# Altium PCB thru-cal-board-1point2in.PcbDoc
Units mm, origin at the board's own origin, x right, y up, seen from the top; angles counter-clockwise.
Board outline 37 x 16 mm, 4 copper layers (Top Layer, Mid-Layer 1, Mid-Layer 2, Bottom Layer), stack 1.105 mm thick; 2 components, 2 nets, 10 pads, 164 vias.
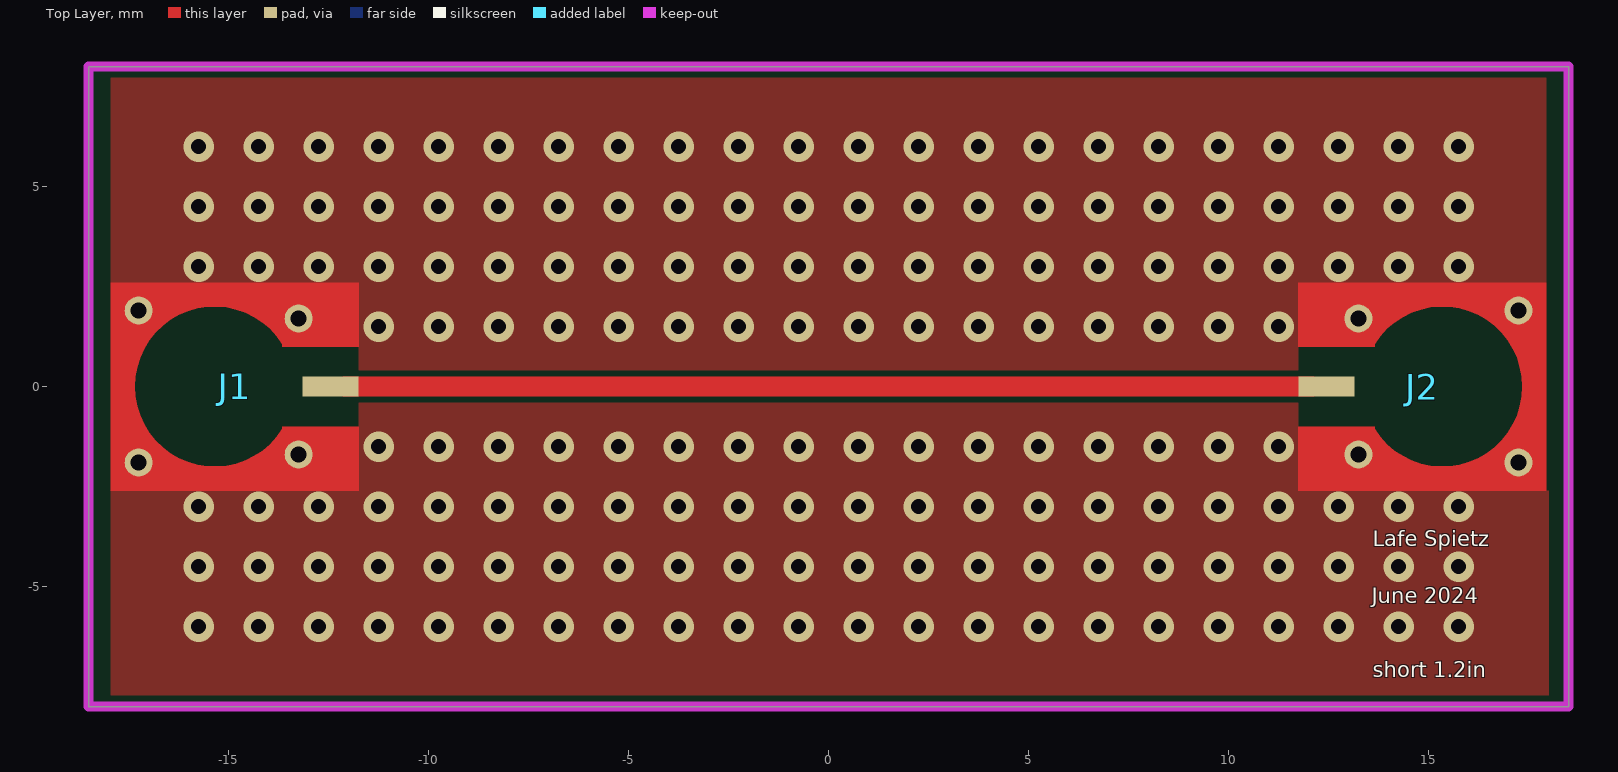
[diagram p0: Top Layer view]
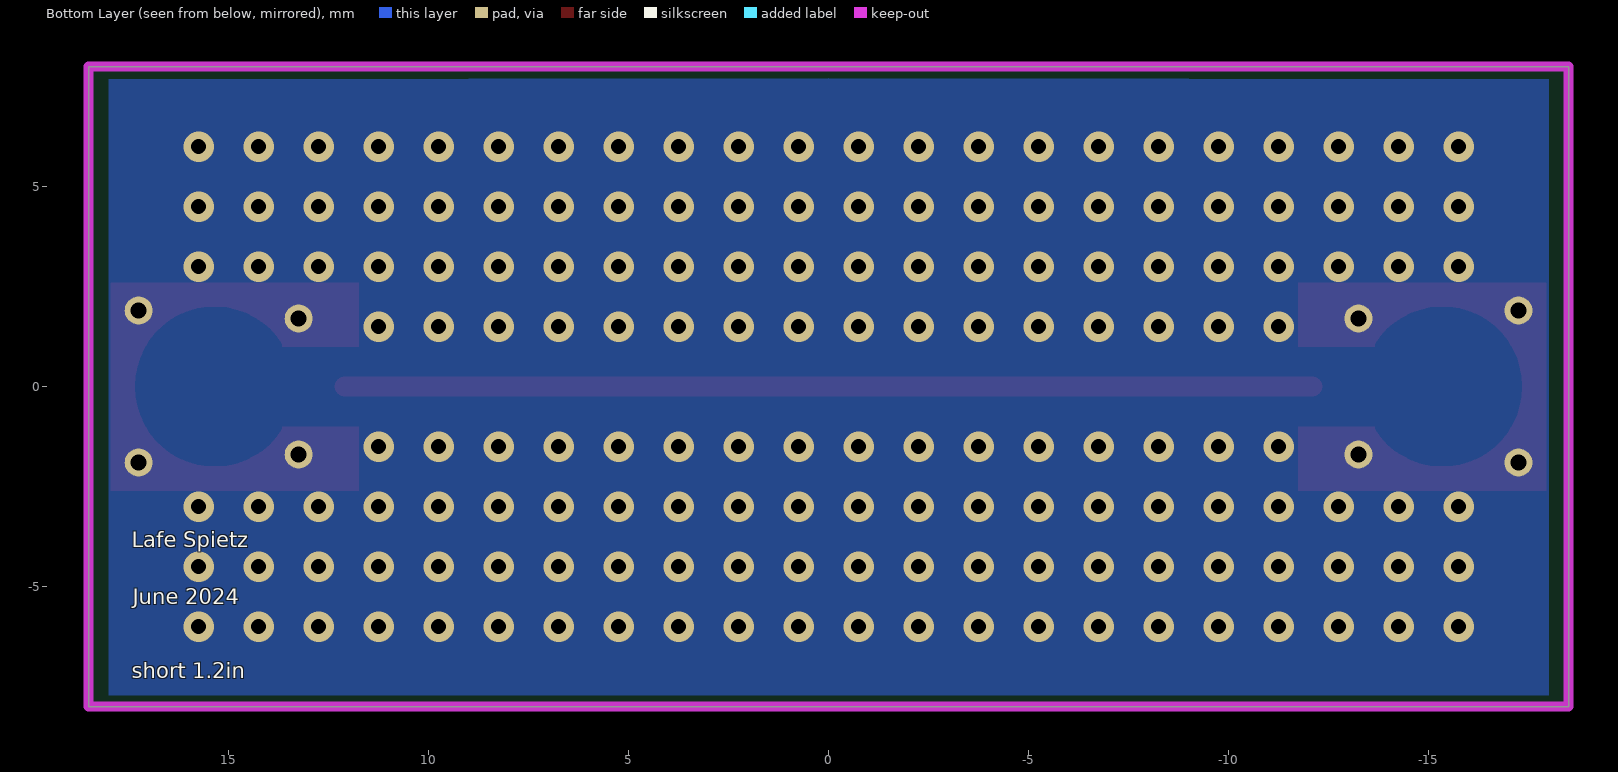
[diagram p1: Bottom Layer view, seen from below]
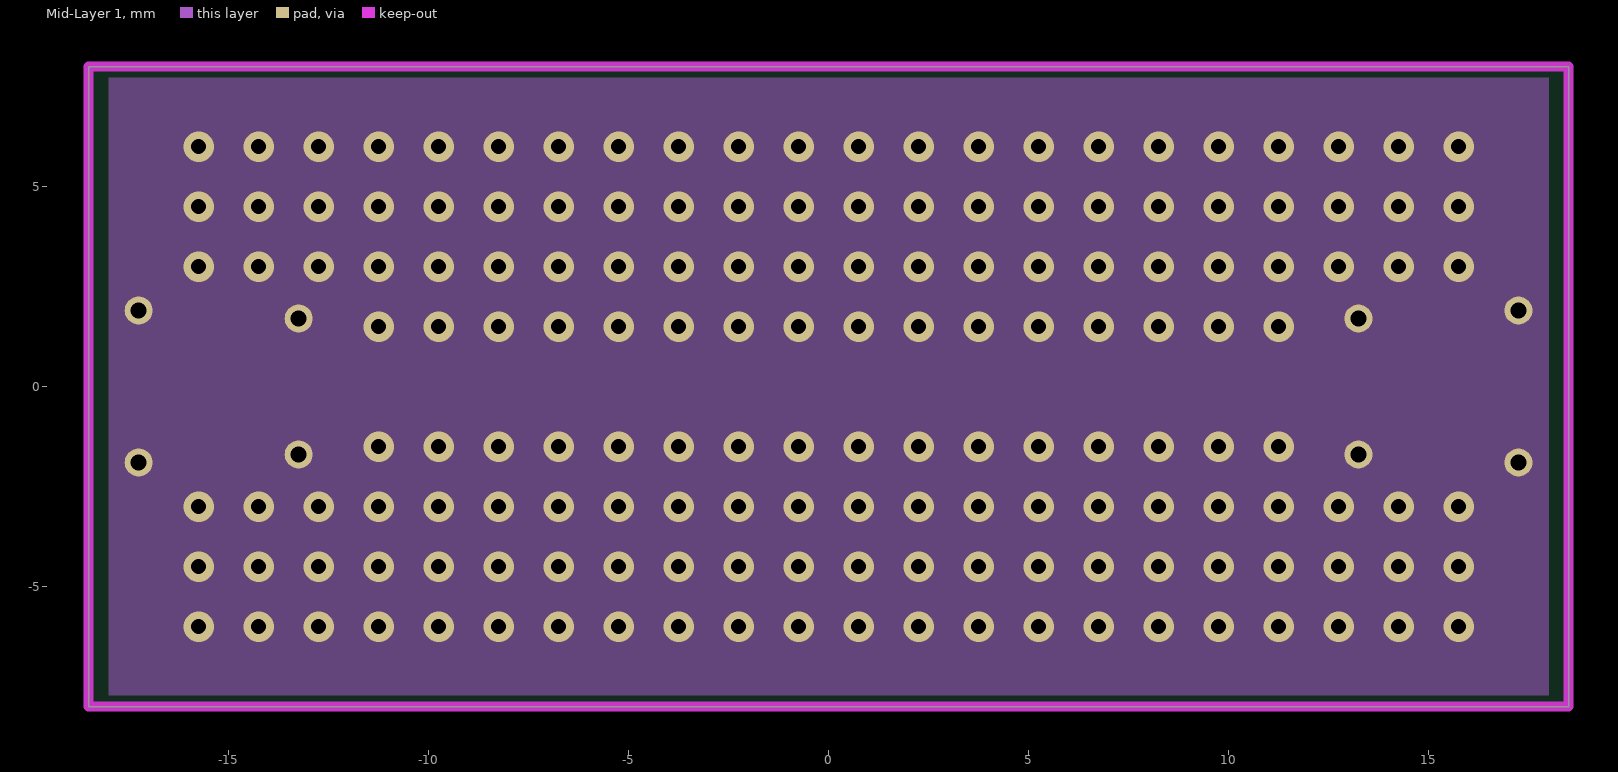
[diagram p2: Mid-Layer 1]
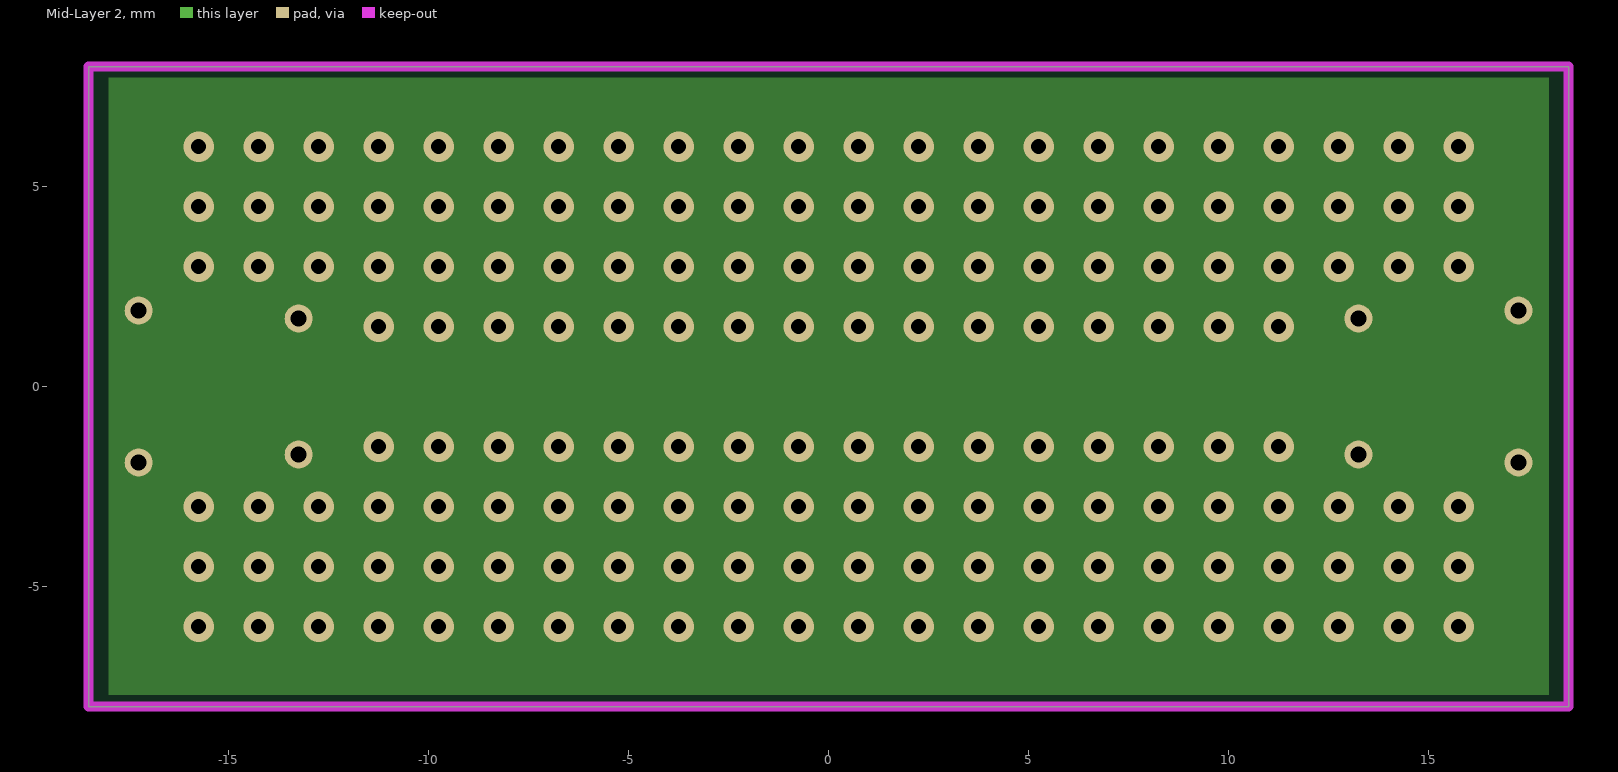
[diagram p3: Mid-Layer 2]

## Layer stack, top to bottom
Top Solder: solder mask 0.0254, SM-001, Dk 4
Top Layer: signal copper 0.035
Core1: dielectric 0.254, RO4350B, Dk 3.48
Mid-Layer 1: signal copper 0.035
Dielectric 1: prepreg 0.1778, PR7628, Dk 4.24
Dielectric 2: prepreg 0.1016, PR2116, Dk 4.17
Dielectric 3: prepreg 0.1778, PR7628, Dk 4.24
Mid-Layer 2: signal copper 0.035
Core2: dielectric 0.254, RO-4350B, Dk 3.48
Bottom Layer: signal copper 0.035
Bottom Solder: solder mask 0.0254, SM-001, Dk 4

## Board outline
-18.5,-8 18.5,-8 18.5,8 -18.5,8

## Design rules (kind name [scope] priority, off if disabled: settings)
Clearance [All] p1: gap=0.254 ignorepadtopadclearanceinfootprint=FALSE except(0: Poly-Poly Poly-Region Poly-Hole; 0.095: Track-Region SMDPad-Region Region-Region; 0.1: Track-Track Track-SMDPad SMDPad-Poly Via-Poly; 0.102: Track-Fill; 0.152: Arc-Poly Track-Poly; 0.203: Arc-SMDPad; 0.229: SMDPad-SMDPad)
PolygonConnect [All] p1: connectstyle=Direct reliefconductorwidth=0.254 reliefentries=4 polygonreliefangle="90 Angle" airgapwidth=0.254
RoutingVias [All] p1: holewidth=0.381 width=0.635 viastyle="Through Hole" minholewidth=0.127 minwidth=0.254 maxholewidth=0.711 maxwidth=1.27
SolderMaskExpansion [All] p1: expansion=0.102 istentingtop=FALSE
Width [All] p1 off: maxlimit=0.55 minlimit=0.1 preferedwidth=0.254 toplayer_prefwidth=0.1 midlayer1_minwidth=0.254 midlayer1_maxwidth=0.254 midlayer2_minwidth=0.254 midlayer2_maxwidth=0.254 bottomlayer_minwidth=0.254 bottomlayer_maxwidth=0.254 minimp=50.000000 maximp=50.000000 favimp=50.000000
Width cpw-Z-1 [All] p2 off: maxlimit=0.5 minlimit=0.174 preferedwidth=0.254 toplayer_minwidth=0.323 toplayer_prefwidth=0.406 impedanceprofiledriven=TRUE impedanceprofileid={FF6547F1-1ACB-4B88-A69B-03F59FE56022} minimp=50.000000 maximp=50.000000 favimp=50.000000
30 further rules are at their usual default settings.

## Components (designator, comment, footprint, x,y, rotation, side; value= is the part's Value field where it differs from the comment)
J1 "SMP-straight-19S141-40ML5" rosenberger-19S141-40ML5 -15.347,0 r90 top
J2 "SMP-straight-19S141-40ML5" rosenberger-19S141-40ML5 15.347,0 r270 top

## Footprints (in the part's own frame and the unit in brackets; to place one, negate y for a bottom-side part, rotate by r counter-clockwise, add the part's x,y. Pads: shape width x height; smd on the part's side, far side on the other; paste and mask are expansions set on the pad)
rosenberger-19S141-40ML5 [mm]
  rect 0.5x1.4 smd: 1(0,-2.9)
  round 0.7 hole 0.4 mask+0: gnd(-1.9,1.9) gnd(-1.7,-2.1) gnd(1.7,-2.1) gnd(1.9,1.9)
  Top Layer region: -2.6,-3.6 -2.6,2.6 2.6,2.6 2.6,-3.6 1,-3.6 1,-1.696 1.06,-1.696 1.759,-0.951 2,0.042 1.718,1.024 0.988,1.739 0,2 -0.988,1.739 -1.718,1.024 -2,0.042 -1.759,-0.951 -1.06,-1.696 -1.06,-1.696 -1,-1.696 -1,-3.6
  body extent -2.5,-3.6 2.5,2.4, height 4.1

## Part data
J1 J2: "SMP Connector Plug, Male Pin 50Ohm Surface Mount Solder", Package=None, Supplier Part Number 1=476-19S201-40ML5, Availability="In Stock", Check_prices=https://www.snapeda.com/parts/853050232/Molex/view-part/?ref=eda, MF=Molex, MP=853050232, Price=None, Purchase-URL=https://pricing.snapeda.com/search/part/853050232/?ref=eda, SnapEDA_Link=https://www.snapeda.com/parts/853050232/Molex/view-part/?ref=snap, Supplier 1=Mouser

## Via types
v1: diameter 0.762, hole 0.381, Top Layer to Bottom Layer, 164 vias

## Nets (pads, with @x,y where several pads share a name; then routed paths per layer and width w, separated by ;. In a path a pad name is that pad's centre, name@x,y a point inside that pad or via, vN(x,y) a via of type N, cw(c..) or ccw(c..) an arc to the next point about the centre after c; other vN are vias at no path point)
GND: J1.gnd J2.gnd
  other v1: -15.75,-6 -14.25,-6 -12.75,-6 -11.25,-6 -9.75,-6 -8.25,-6 -6.75,-6 -5.25,-6 -3.75,-6 -2.25,-6 -0.75,-6 0.75,-6 2.25,-6 3.75,-6 5.25,-6 6.75,-6 8.25,-6 9.75,-6 11.25,-6 12.75,-6 14.25,-6 15.75,-6 -15.75,-4.5 -14.25,-4.5 -12.75,-4.5 -11.25,-4.5 -9.75,-4.5 -8.25,-4.5 -6.75,-4.5 -5.25,-4.5 -3.75,-4.5 -2.25,-4.5 -0.75,-4.5 0.75,-4.5 2.25,-4.5 3.75,-4.5 5.25,-4.5 6.75,-4.5 8.25,-4.5 9.75,-4.5 11.25,-4.5 12.75,-4.5 14.25,-4.5 15.75,-4.5 -15.75,-3 -14.25,-3 -12.75,-3 -11.25,-3 -9.75,-3 -8.25,-3 -6.75,-3 -5.25,-3 -3.75,-3 -2.25,-3 -0.75,-3 0.75,-3 2.25,-3 3.75,-3 5.25,-3 6.75,-3 8.25,-3 9.75,-3 11.25,-3 12.75,-3 14.25,-3 15.75,-3 -11.25,-1.5 -9.75,-1.5 -8.25,-1.5 -6.75,-1.5 -5.25,-1.5 -3.75,-1.5 -2.25,-1.5 -0.75,-1.5 0.75,-1.5 2.25,-1.5 3.75,-1.5 5.25,-1.5 6.75,-1.5 8.25,-1.5 9.75,-1.5 11.25,-1.5 -11.25,1.5 -9.75,1.5 -8.25,1.5 -6.75,1.5 -5.25,1.5 -3.75,1.5 -2.25,1.5 -0.75,1.5 0.75,1.5 2.25,1.5 3.75,1.5 5.25,1.5 6.75,1.5 8.25,1.5 9.75,1.5 11.25,1.5 -15.75,3 -14.25,3 -12.75,3 -11.25,3 -9.75,3 -8.25,3 -6.75,3 -5.25,3 -3.75,3 -2.25,3 -0.75,3 0.75,3 2.25,3 3.75,3 5.25,3 6.75,3 8.25,3 9.75,3 11.25,3 12.75,3 14.25,3 15.75,3 -15.75,4.5 -14.25,4.5 -12.75,4.5 -11.25,4.5 -9.75,4.5 -8.25,4.5 -6.75,4.5 -5.25,4.5 -3.75,4.5 -2.25,4.5 -0.75,4.5 0.75,4.5 2.25,4.5 3.75,4.5 5.25,4.5 6.75,4.5 8.25,4.5 9.75,4.5 11.25,4.5 12.75,4.5 14.25,4.5 15.75,4.5 -15.75,6 -14.25,6 -12.75,6 -11.25,6 -9.75,6 -8.25,6 -6.75,6 -5.25,6 -3.75,6 -2.25,6 -0.75,6 0.75,6 2.25,6 3.75,6 5.25,6 6.75,6 8.25,6 9.75,6 11.25,6 12.75,6 14.25,6 15.75,6
NetJ1_1: J1.1 J2.1 | length 24.2
  Top Layer w0.495: J1.1@-12.1,0 J2.1@12.1,0

## Polygon pours and split planes (outlines as drawn)
GND on Top Layer "NONET_L02_P-001" (solid, pour order 7): -17.947,-2.6 -11.4,-2.6 -11.4,-7.715 -17.947,-7.715
GND on Top Layer "NONET_L02_P-001" (solid, pour order 6): -17.947,7.714 -11.428,7.714 -11.428,2.581 -17.947,2.581
GND on Top Layer "NONET_L02_P-001" (solid, pour order 5): 11.5,7.715 17.947,7.715 17.947,2.535 11.5,2.535
GND on Top Layer "NONET_L02_P-001" (solid, pour order 4): 11.5,-2.6 18,-2.6 18,-7.715 11.5,-7.715
GND on Top Layer "GND_L01_P000" (solid, pour order 0): -11.747,-7.75 11.747,-7.75 11.747,7.75 -11.747,7.75
GND on Mid-Layer 1 "GND_L02_P001" (solid, pour order 1): -18,7.722 18,7.722 18,-7.737 -18,-7.737
GND on Bottom Layer "GND_L04_P003" (solid, pour order 3): -18,7.676 -0.011,7.702 18,7.676 18,-7.741 -18,-7.741
no net on Top Solder "NONET_L02_P-001" (solid): -10.892,-2.532 -12.161,-2.532 -12.161,-2.921 -17.936,-2.921 -17.936,-7.921 -10.892,-7.921
no net on Top Solder "NONET_L02_P-001" (solid): -10.885,2.575 -12.154,2.575 -12.154,2.964 -17.929,2.964 -17.929,7.964 -10.885,7.964
no net on Top Solder "NONET_L02_P-001" (solid): 10.949,2.496 12.218,2.496 12.218,2.884 17.993,2.884 17.993,7.884 10.949,7.884
no net on Top Solder "NONET_L02_P-001" (solid): 10.956,-2.612 12.225,-2.612 12.225,-3 13.275,-3 13.275,-8 10.956,-8
no net on Top Solder "NONET_L02_P-001" (solid): 12.226,-2.612 12.226,-1.009 11.497,-1.009 11.497,-0.407 10.956,-0.407 10.956,-2.612
no net on Top Solder "NONET_L02_P-001" (solid): 11.509,0.988 11.509,0.413 10.956,0.413 10.956,2.617 12.218,2.617 12.218,0.988
no net on Top Solder "NONET_L02_P-001" (solid): -12.154,2.623 -12.154,1.021 -11.517,1.021 -11.517,0.419 -10.914,0.419 -10.914,2.623
no net on Top Solder "NONET_L02_P-001" (solid): -11.529,-0.977 -11.529,-0.402 -10.914,-0.402 -10.914,-2.606 -12.161,-2.606 -12.161,-0.977
GND on Mid-Layer 2 "GND_L03_P002" (solid, pour order 2): -18,7.722 18,7.722 18,-7.703 -18,-7.703
no net on Bottom Solder "NONET_L02_P-001" (solid): 18,8 -18,8 -18,-8 18,-8

## Keep-outs
Keep-Out Layer:
  lines w0.254: -18.5,-8 11.5,-8 18.5,-8 18.5,8 -18.5,8 -18.5,-8

## Silkscreen, mask and mechanical layers (free items; w line width, h text height)
Top Overlay:
  text "Lafe Spietz" at 13.602,-3.996 h0.38
  text "June 2024" at 13.577,-5.423 h0.38
  text "short 1.2in" at 13.602,-7.273 h0.38
Bottom Overlay:
  text "Lafe Spietz" at 17.423,-4.021 h0.38
  text "June 2024" at 17.398,-5.448 h0.38
  text "short 1.2in" at 17.423,-7.298 h0.38
Top Solder:
  rectangle: -10.992,-8 11.128,8
Bottom Solder:
  pour cut-out: 18.5,-8 18.5,-3.25 13.25,-3.25 13.25,-8